# EAGLE board NanoDemultiplexerAndSDcardNew (EAGLE 9.5.2)
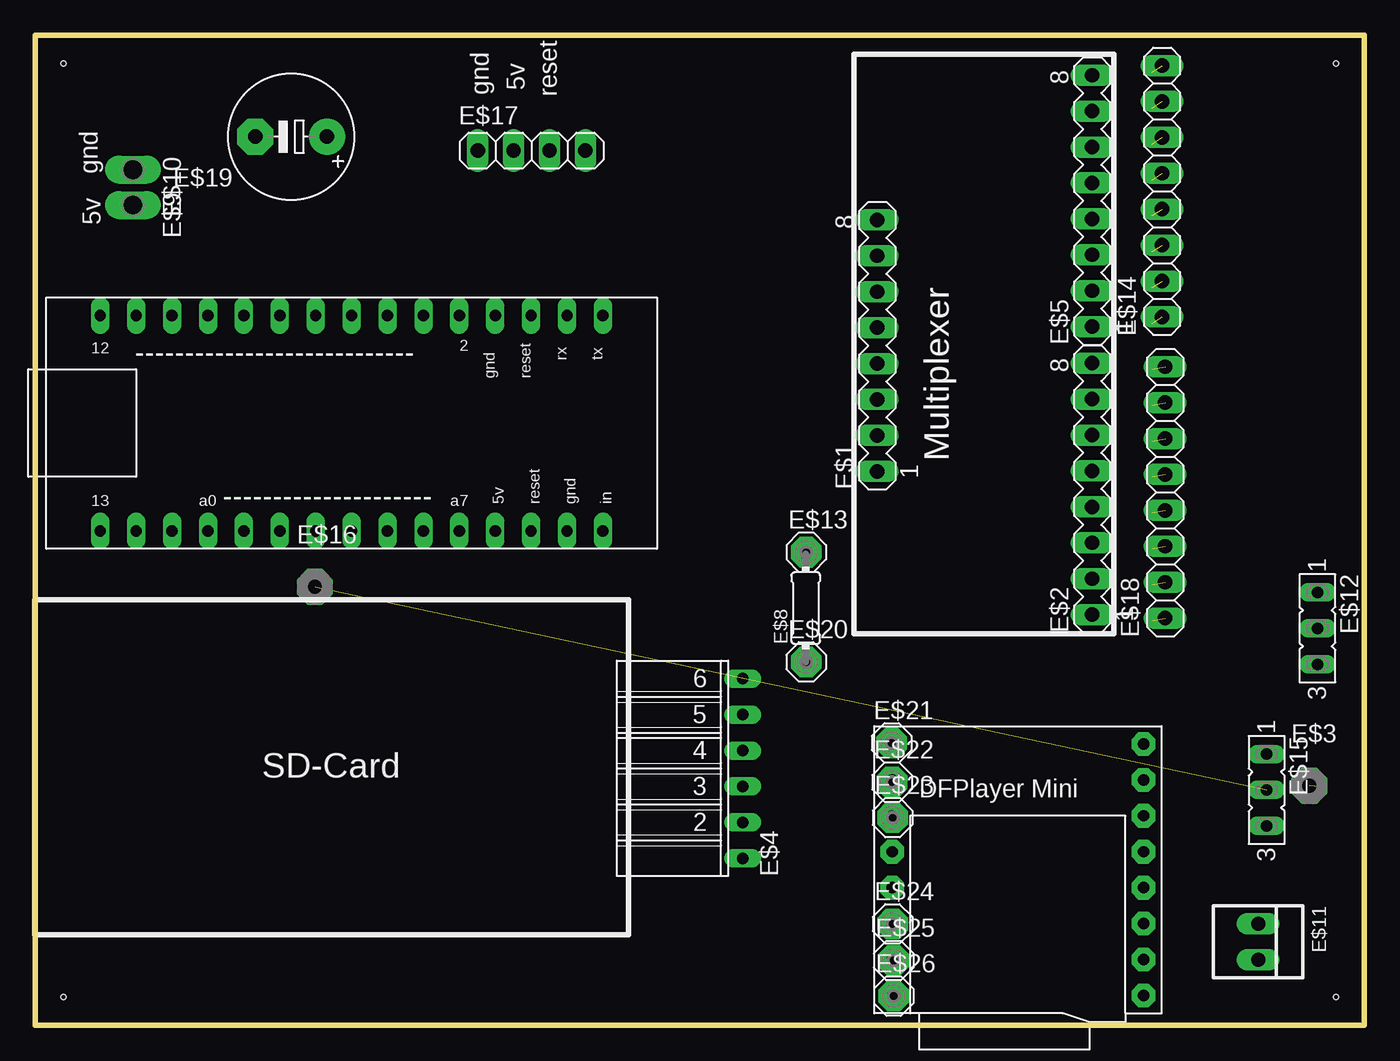
[diagram p0: board, top side]
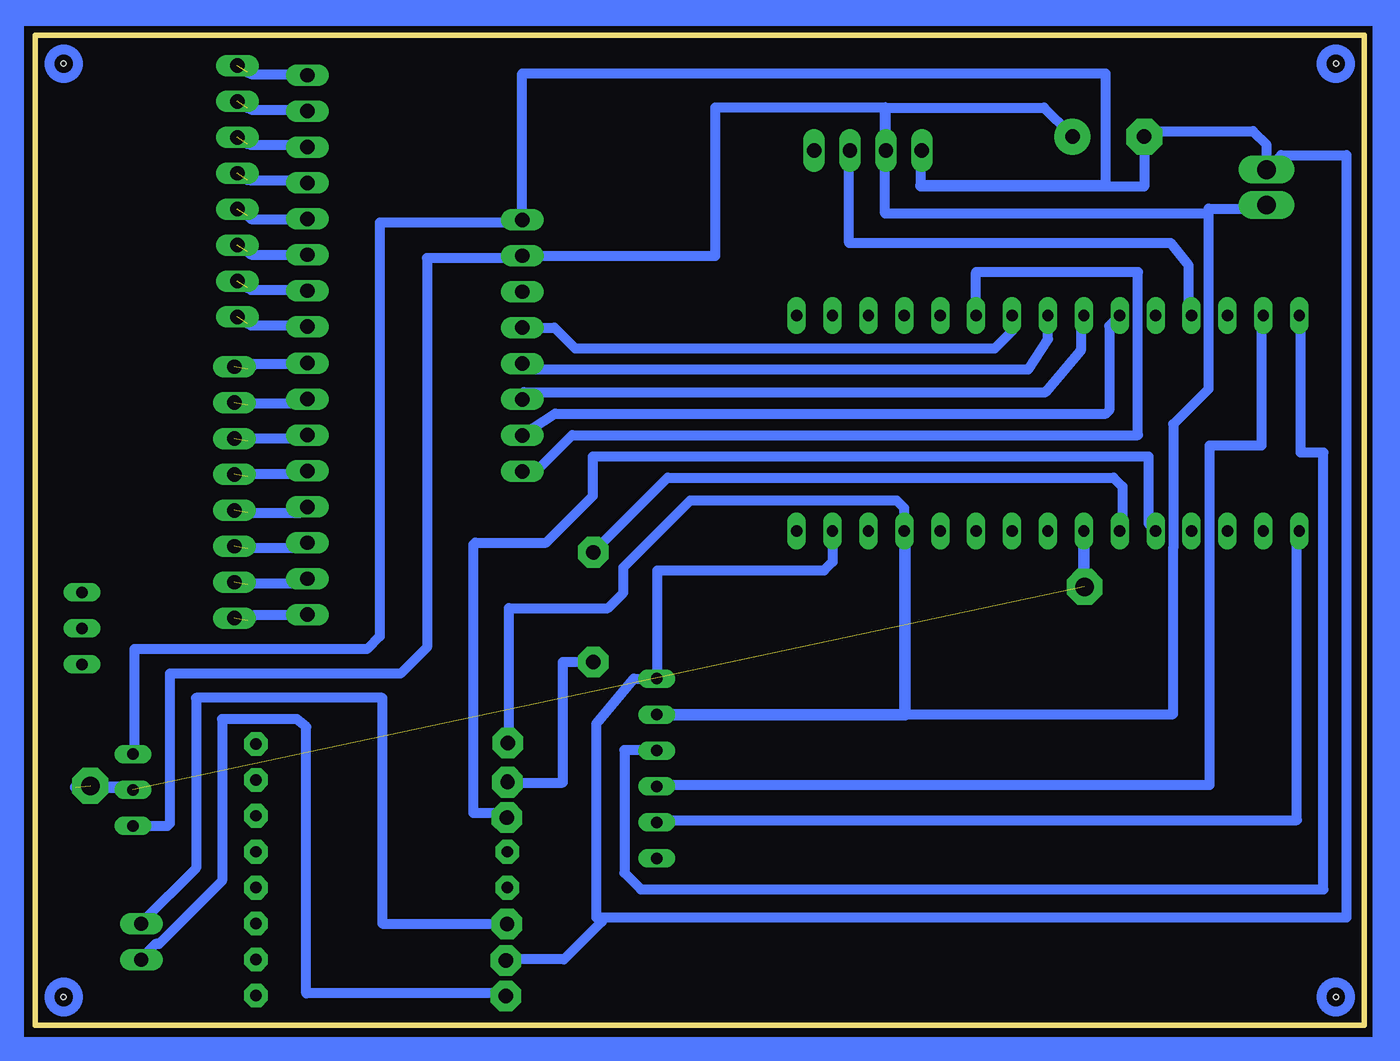
[diagram p1: board, bottom side, seen from below]

Size 94 x 70 mm. Coordinates in mm from the lower left corner, seen from the top.
Outline: 0,0 0,70 94,70 94,0 0,0
Copper layers (1*16): Top 0.035mm / dielectric 1.5mm / Bottom 0.035mm
Design rules "for_pcb_garage_middle *": minimum track width 0.7mm, minimum drill 0.35mm, track to track 0.2mm, track to pad 0.2mm, pad to pad 0.2mm, via to via 6mil, smd to smd 6mil, copper to edge 40mil, drill to drill 6mil, minimum pad ring 10mil, minimum via ring 8mil, stop-mask expansion 4mil, vias tented up to drill 0mil, thermal gap 10mil
Holes 0.35 mm at 92,2 92,68 2,68 2,2

## Footprints (pad centres in the part's own frame; a part is rotated, then mirrored left to right if it is on the bottom)
MA08-1 = drill 1.016 long: 1 -8.89,0; 2 -6.35,0; 3 -3.81,0; 4 -1.27,0; 5 1.27,0; 6 3.81,0; 7 6.35,0; 8 8.89,0
PAD-01 = drill 1.321 pad 2.54 octagon: 1 0,0
FE06W = drill 0.813 long: 1 -6.35,0; 2 -3.81,0; 3 -1.27,0; 4 1.27,0; 5 3.81,0; 6 6.35,0
DFPLAYER = drill 0.8 pad 1.676 octagon: ADKEY1 8.89,-1.27; ADKEY2 8.89,1.27; BUSY 8.89,8.89; DAC_L -8.89,-1.27; DAC_R -8.89,1.27; GND_1 -8.89,-6.35; GND_2 8.89,-6.35; IO1 8.89,-8.89; IO2 8.89,-3.81; RX -8.89,6.35; SPK1 -8.89,-3.81; SPK2 -8.89,-8.89; TX -8.89,3.81; USB+ 8.89,3.81; USB- 8.89,6.35; VCC -8.89,8.89
ARDUINO-NANO = drill 0.8 long: P$2 -17.78,7.62; P$4 -15.24,7.62; P$5 -12.7,7.62; P$8 -10.16,7.62; P$9 -7.62,7.62; P$12 -5.08,7.62; P$13 -2.54,7.62; P$16 0,7.62; P$17 2.54,7.62; P$20 5.08,7.62; P$21 7.62,7.62; P$24 10.16,7.62; P$25 12.7,7.62; P$28 15.24,7.62; P$29 17.78,7.62; P$31 -17.78,-7.62; P$34 -15.24,-7.62; P$35 -12.7,-7.62; P$38 -10.16,-7.62; P$39 -7.62,-7.62; P$42 -5.08,-7.62; P$43 -2.54,-7.62; P$46 0,-7.62; P$47 2.54,-7.62; P$50 5.08,-7.62; P$51 7.62,-7.62; P$54 10.16,-7.62; P$55 12.7,-7.62; P$58 15.24,-7.62; P$59 17.78,-7.62
0204/7 = drill 0.813 octagon: 1 -3.81,0; 2 3.81,0
P1-13Y = drill 1.321 pad 1.905 long: TP 0,0
22-23-2021 = drill 1 long: 1 -1.27,0; 2 1.27,0
FE03-1 = drill 0.813 long: 1 -5.08,0; 2 -2.54,0; 5 0,0
MCS10B = drill 1.016 pad 2.159 octagon: MP 0,0
1X08 = drill 1.016 long: 1 -8.89,0; 2 -6.35,0; 3 -3.81,0; 4 -1.27,0; 5 1.27,0; 6 3.81,0; 7 6.35,0; 8 8.89,0
1X04 = drill 1.016 long: 1 -3.81,0; 2 -1.27,0; 3 1.27,0; 4 3.81,0
E5-8,5 = drill 1.016 pad 2.54: + -2.54,0 | drill 1.016 pad 2.54 octagon: - 2.54,0

## Placement (x,y rotation side)
E$1  [MA08-1]  59.56,48.06 90 top
E$2  [MA08-1]  74.76,37.93 90 top
E$3  [PAD-01]  90.11,16.92 0 top
E$4  [FE06W]  50.03,18.16 90 top
E$5  [MA08-1]  74.76,58.29 90 top
E$6  [DFPLAYER]  69.5,11 0 top
E$7  [ARDUINO-NANO]  22.37,42.58 0 top
E$8  2.2K  [0204/7]  54.5,29.5 90 top
E$9  [P1-13Y]  6.9,58 270 top
E$10  [P1-13Y]  6.9,60.5 270 top
E$11  [22-23-2021]  86.5,5.9 270 top
E$12  [FE03-1]  90.69,25.53 270 top
E$13  [MCS10B]  54.54,33.45 0 top
E$14  [1X08]  79.71,58.98 90 top
E$15  [FE03-1]  87.1,14.1 270 top
E$16  [PAD-01]  19.78,30.99 0 top
E$17  [1X04]  35.1,61.85 0 top
E$18  [1X08]  79.93,37.68 90 top
E$19  1000uF  [E5-8,5]  18.09,62.83 180 top
E$20  [MCS10B]  54.53,25.69 0 top
E$21  [MCS10B]  60.57,19.96 0 top
E$22  [MCS10B]  60.6,17.18 0 top
E$23  [MCS10B]  60.64,14.68 0 top
E$24  [MCS10B]  60.63,7.16 0 top
E$25  [MCS10B]  60.71,4.58 0 top
E$26  [MCS10B]  60.72,2.06 0 top

## Library data of the parts
E$1 E$2 E$5 = con-lstb
E$3 E$16 = discrete
E$4 = con-lsta
E$6 = DFPlayer_v1
E$7 = LSGPackages
E$8 = resistor
E$9 E$10 = testpad
E$11 = con-molex
E$12 E$15 = con-lsta2
E$13 E$20-E$26 = solpad
E$14 E$17 E$18 = pinhead
E$19 = ref-packages-longpad

## Nets
5V: E$1.7 E$4.5 E$6.VCC E$7.P$54 E$9.TP E$15.5 E$17.2 E$19.+
GND: E$1.8 E$4.6 E$6.GND_1 E$7.P$58 E$10.TP E$15.1 E$17.1 E$19.-
MISO: E$4.4 E$7.P$2
MOSI: E$4.3 E$7.P$4
RX: E$6.RX E$8.1
S0: E$1.5 E$7.P$17
S1: E$1.4 E$7.P$16
S2: E$1.3 E$7.P$13
S3: E$1.2 E$7.P$12
S$9: E$7.P$9
S$10: E$7.P$42 E$8.2
S$15: E$5.8 E$14.8
S$16: E$5.7 E$14.7
S$17: E$5.6 E$14.6
S$18: E$5.5 E$14.5
S$19: E$5.4 E$14.4
S$20: E$5.3 E$14.3
S$21: E$5.2 E$14.2
S$22: E$5.1 E$14.1
S$23: E$2.8 E$18.8
S$24: E$2.7 E$18.7
S$25: E$2.6 E$18.6
S$26: E$2.5 E$18.5
S$30: E$7.P$8 E$17.3
S$31: E$2.4 E$18.4
S$32: E$2.3 E$18.3
S$33: E$2.2 E$18.2
S$34: E$2.1 E$18.1
SCK: E$4.2 E$7.P$31
SIGN: E$1.1 E$7.P$20
SPK1: E$6.SPK1 E$11.1
SPK2: E$6.SPK2 E$11.2
TX: E$6.TX E$7.P$39
VOLUME-CONTROL: E$3.1 E$7.P$43 E$15.2 E$16.1

## Tracks (layer width: path | path; a pad name or v marks a point on that pad's centre or on a via)
5V
  Bottom 0.7: 48,22 50,22 E$4.5 | E$19.+ 20.75,63 22.65,64.9 33.89,64.9 | 11,57.41 33.89,57.41 33.89,64.9 | E$9.TP 7.15,57.75 11,57.75 11,57.41 | E$15.5 84.65,14.1 84.48,14.27 84.48,24.86 68.16,24.86 66.3,26.72 66.3,54.25 59.75,54.25 E$1.7 45.89,54.41 45.89,64.91 33.89,64.91 | 33.89,64.9 33.89,64.91 | E$17.2 33.83,64.91 33.89,64.91 | E$6.VCC 60.5,20 60.5,29.5 53.5,29.5 52.4,30.6 52.4,32.37 47.66,37.12 33.08,37.12 32.53,36.57 E$7.P$54 32.53,21.99 13.51,21.99 13.51,33.74 13.5,33.75 13.5,42.5 11,45 11,57.41
  Bottom 0.813: E$4.5 32.5,21.97 32.5,34.93 E$7.P$54
GND
  Bottom 0.7: E$7.P$58 37.61,32.76 38.21,32.16 50,32.16 50,24.75 E$4.6 51.66,24.51 54.34,21.3 54.34,7.62 53.95,7.62 | E$6.GND_1 56.61,4.65 53.95,7.31 53.95,7.62 | E$15.1 87,19.25 87,26.6 70.53,26.6 69.63,27.5 69.63,56.75 59.75,56.75 E$1.8 59.56,67.3 18.3,67.3 18.3,59.37 18.3,59.3 15.55,59.3 E$19.- 15.17,63.22 7.87,63.22 6.9,62.25 E$10.TP 5.88,61.52 1.26,61.52 1.26,7.62 53.95,7.62 | 31.35,59.3 31.35,61.85 E$17.1
  Bottom 0.813: 31.37,59.37 18.3,59.37
MISO
  Bottom 0.7: E$4.4 50.08,19.47 52.33,19.47 52.33,10.78 51.16,9.61 2.88,9.61 2.88,40.5 4.5,40.5 4.5,50 E$7.P$2
MOSI
  Bottom 0.7: E$7.P$4 7.25,50 7.25,41 10.92,41 10.92,17 50,17 E$4.3
RX
  Bottom 0.7: E$8.1 56.69,25.69 56.69,17.16 60.26,17.16 60.45,17.35 E$6.RX
S0
  Bottom 0.7: E$1.5 57.28,49.33 55.81,47.87 26.14,47.87 24.91,49.09 E$7.P$17
S1
  Bottom 0.7: E$1.4 59.15,46.38 23.76,46.38 22.37,48.52 E$7.P$16
S2
  Bottom 0.7: E$7.P$13 20.05,49.98 20.05,47.69 22.53,44.77 59.44,44.77 E$1.3
S3
  Bottom 0.7: E$7.P$12 18.03,49.46 18.03,43.48 18.26,43.25 57.23,43.25 E$1.2
S$10
  Bottom 0.7: E$7.P$42 17.1,35.15 17.1,38.1 17.73,38.73 49.27,38.73 54.5,33.5 E$8.2
S$15  (1 unrouted)
  Bottom 0.7: E$5.8 75,67.25 78.75,67.25 78.99,67.39
S$16  (1 unrouted)
  Bottom 0.7: E$5.7 75,64.75 78.75,64.75 78.99,64.85
S$17  (1 unrouted)
  Bottom 0.7: E$5.6 75,62.25 78.75,62.25 78.99,62.31
S$18  (1 unrouted)
  Bottom 0.7: E$5.5 75,59.75 78.75,59.75 78.99,59.77
S$19  (1 unrouted)
  Bottom 0.7: E$5.4 75,57 78.75,57 78.99,57.23
S$20  (1 unrouted)
  Bottom 0.7: E$5.3 75,54.5 78.75,54.5 78.99,54.69
S$21  (1 unrouted)
  Bottom 0.7: E$5.2 75,52 78.75,52 78.99,52.15
S$22  (1 unrouted)
  Bottom 0.7: E$5.1 75,49.5 78.75,49.5 78.99,49.61
S$23  (1 unrouted)
  Bottom 0.7: 78.99,46.39 78.75,46.5 78.5,46.75 75,46.75 E$2.8
S$24  (1 unrouted)
  Bottom 0.7: E$2.7 75,44.25 75.25,44 78.75,44 78.99,43.85
S$25  (1 unrouted)
  Bottom 0.7: E$2.6 75,41.5 78.75,41.5 78.99,41.31
S$26  (1 unrouted)
  Bottom 0.7: E$2.5 75,39 78.75,39 78.99,38.77
S$30
  Bottom 0.7: E$7.P$8 12.43,50.42 12.43,53.73 13.71,55.33 36.43,55.33 36.43,61.85 E$17.3
S$31  (1 unrouted)
  Bottom 0.7: E$2.4 75,36.5 75.25,36.25 78.75,36.25 78.99,36.23
S$32  (1 unrouted)
  Bottom 0.7: E$2.3 75,34 75.25,33.75 78.75,33.75 78.99,33.69
S$33  (1 unrouted)
  Bottom 0.7: E$2.2 75,31.5 75.25,31.25 78.75,31.25 78.99,31.15
S$34  (1 unrouted)
  Bottom 0.7: 78.99,28.61 78.75,28.75 78.5,29 75,29 E$2.1
SCK
  Bottom 0.7: E$7.P$31 4.75,34.75 4.75,14.5 50,14.5 E$4.2
SIGN
  Bottom 0.7: E$7.P$20 27.45,53.25 16,53.25 16,41.73 56.02,41.73 58.58,39.17 E$1.1
SPK1
  Bottom 0.7: E$6.SPK1 69.45,7.19 69.45,23.14 82.63,23.14 82.63,11.12 86.5,7.25 E$11.1
SPK2
  Bottom 0.7: E$11.2 86.5,4.75 85.5,5.75 85.25,5.75 80.79,10.21 80.79,21.65 75.5,21.65 74.83,21.1 74.83,2.25 60.75,2.25 E$6.SPK2
TX
  Bottom 0.7: E$7.P$39 15.26,35.47 15.26,40.23 54.56,40.23 54.56,37.44 57.87,34.13 62.87,34.13 63,34 63,15 60.75,15 E$6.TX
VOLUME-CONTROL  (2 unrouted)
  Bottom 0.813: E$7.P$43 19.83,31.05 E$16.1 | E$15.2 87.29,16.83 91.13,16.83
(copper drawn outside any net)
  shapes: Bottom area x4, Bottom circle x4

## Text on the board
tPlace: gnd | 5v | reset | gnd | 5v | Multiplexer | SD-Card
bTest: gnd | vcc | vcc | gnd | vcc | gnd | Demultiplexer | SD card | Tx | Vcc battery | Gnd battery